# EAGLE board mc_board (EAGLE 7.5.0)
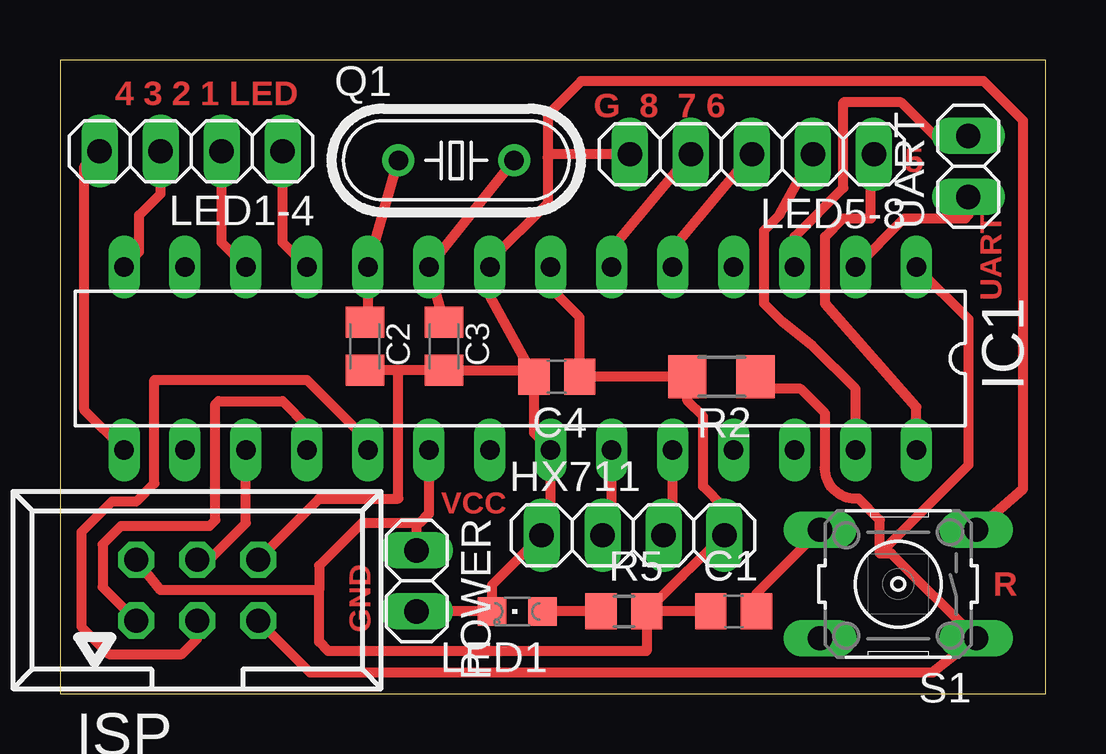
[diagram p0: board, top side]

Size 41.07 x 26.41 mm. Coordinates in mm from the lower left corner, seen from the top.
Outline: 0,0 41.07,0 41.07,26.41 0,26.41 0,0
Copper layers (1*16): Top 0.035mm / dielectric 1.5mm / Bottom 0.035mm
Design rules "default *": minimum track width 10mil, minimum drill 24mil, track to track 8mil, track to pad 8mil, pad to pad 8mil, via to via 8mil, smd to smd 8mil, copper to edge 25mil, drill to drill 8mil, minimum pad ring 10mil, minimum via ring 8mil, stop-mask expansion 4mil, vias tented up to drill 0mil, thermal gap 10mil

## Footprints (pad centres in the part's own frame; a part is rotated, then mirrored left to right if it is on the bottom)
C0805 = smd 1.3 x 1.5: 1 -0.95,0; 2 0.95,0
C0805K = smd 1.3 x 1.6: 1 -1,0; 2 1,0
1X04 = drill 1.016 long: 1 -3.81,0; 2 -1.27,0; 3 1.27,0; 4 3.81,0
DIL28-3 = drill 0.813 long: 1 -16.51,-3.81; 2 -13.97,-3.81; 3 -11.43,-3.81; 4 -8.89,-3.81; 5 -6.35,-3.81; 6 -3.81,-3.81; 7 -1.27,-3.81; 8 1.27,-3.81; 9 3.81,-3.81; 10 6.35,-3.81; 11 8.89,-3.81; 12 11.43,-3.81; 13 13.97,-3.81; 14 16.51,-3.81; 15 16.51,3.81; 16 13.97,3.81; 17 11.43,3.81; 18 8.89,3.81; 19 6.35,3.81; 20 3.81,3.81; 21 1.27,3.81; 22 -1.27,3.81; 23 -3.81,3.81; 24 -6.35,3.81; 25 -8.89,3.81; 26 -11.43,3.81; 27 -13.97,3.81; 28 -16.51,3.81
057-006-1 = drill 1 octagon: 1 -2.54,-1.27; 2 -2.54,1.27; 3 0,-1.27; 4 0,1.27; 5 2.54,-1.27; 6 2.54,1.27
CHIPLED_0805 = smd 1.2 x 1.2: A 0,-1.05; C 0,1.05
1X05 = drill 1.016 long: 1 -5.08,0; 2 -2.54,0; 3 0,0; 4 2.54,0; 5 5.08,0
1X02 = drill 1.016 long: 1 -1.27,0; 2 1.27,0
HC49/S = drill 0.813: 1 2.413,0; 2 -2.413,0
R1206 = smd 1.6 x 1.803: 1 -1.422,0; 2 1.422,0
R0805 = smd 1.3 x 1.5: 1 -0.95,0; 2 0.95,0
B3F-10XX = drill 1.016 long: 1 -3.251,2.261; 2 3.251,2.261; 3 -3.251,-2.261; 4 3.251,-2.261

## Placement (x,y rotation side)
C1  1uF  [C0805]  28.07,3.43 0 top
C2  18pF  [C0805K]  12.7,14.48 270 top
C3  18pF  [C0805K]  16,14.48 270 top
C4  100n  [C0805]  20.7,13.21 180 top
HX711  JP1  [1X04]  23.88,6.6 0 top
IC1  MEGA8-P  [DIL28-3]  19.18,13.97 180 top
ISP  ISP-Connector  [057-006-1]  5.71,4.32 0 top
LED1  green  [CHIPLED_0805]  19.05,3.43 90 top
LED1-4  JP3  [1X04]  5.46,22.61 180 top
LED5-8  JP2  [1X05]  28.83,22.48 180 top
POWER  JP2  [1X02]  14.86,4.7 270 top
Q1  16MHz  [HC49/S]  16.51,22.23 0 top
R2  10k  [R1206]  27.56,13.21 180 top
R5  680  [R0805]  23.5,3.43 0 top
S1  S1  [B3F-10XX]  34.92,4.57 180 top
UART  JP2  [1X02]  37.85,21.97 90 top

## Library data of the parts
C1 C4 R2 R5 = rcl-2
C2 C3 = resistor
HX711 LED1-4 LED5-8 POWER UART = pinhead
IC1 = atmel; OC_FARNELL: unknown; OC_NEWARK: unknown
ISP = con-panduit; OC_FARNELL: unknown; OC_NEWARK: unknown
LED1 = led
Q1 = crystal; OC_FARNELL: 1667008; OC_NEWARK: unknown
S1 = switch-omron; MPN: B3F-1000; OC_FARNELL: 176432; OC_NEWARK: 36M3542

## Nets
+5V: C1.1 C4.1 HX711.4 IC1.7 IC1.20 ISP.2 POWER.1 R2.2 R5.2
GND: C2.2 C3.2 C4.2 HX711.1 IC1.8 IC1.22 ISP.6 LED1.C LED5-8.5 POWER.2 S1.3
N$4: LED1.A R5.1
N$5: C3.1 IC1.9 Q1.1
N$6: C2.1 IC1.10 Q1.2
N$9: C1.2 S1.4
PB0/LED3: IC1.14 LED1-4.3
PB1/LED4: IC1.15 LED1-4.4
PB2: IC1.16
PB3/MOSI: IC1.17 ISP.4
PB4/MISO: IC1.18 ISP.1
PB5/SCK: IC1.19 ISP.3
PC0/DT: HX711.2 IC1.23
PC1/SCK: HX711.3 IC1.24
PC2: IC1.25
PC3: IC1.26
PC4/LED6: IC1.27 LED5-8.2
PC5/LED5: IC1.28 LED5-8.1
PD0/UART: IC1.2 UART.1
PD1/UART: IC1.3 UART.2
PD2: IC1.4
PD3/LED7: IC1.5 LED5-8.3
PD4/LED8: IC1.6 LED5-8.4
PD5/LED1: IC1.11 LED1-4.1
PD6/LED2: IC1.12 LED1-4.2
PD7: IC1.13
RESET: IC1.1 ISP.5 R2.1 S1.1
VDD: IC1.21

## Tracks (layer width: path | path; a pad name or v marks a point on that pad's centre or on a via)
+5V
  Top 0.406: IC1.20 15.37,7.49 14.99,7.11 14.86,7.11 | 14.86,7.11 12.57,7.11 10.79,5.33 10.79,4.32 | 10.79,4.32 4.19,4.32 ISP.2 | POWER.1 14.86,7.11 | IC1.7 20.45,16.89 21.65,15.69 C4.1 R2.2 26.14,12.22 26.8,11.56 26.8,8.64 27.69,7.75 HX711.4 25.91,4.89 R5.2 | C1.1 R5.2 | R5.2 24.45,1.78 11.18,1.78 10.79,2.16 10.79,4.32
GND
  Top 0.406: 14.1,13.48 C3.2 19.48,13.48 C4.2 | 14.1,13.48 C2.2 | C4.2 17.91,16.58 IC1.8 17.91,18.03 20.32,20.45 20.32,22.35 | C4.2 19.75,10.86 IC1.22 20.45,6.99 HX711.1 18,4.54 LED1.C POWER.2 | 14.1,13.48 14.1,8.13 10.79,8.13 ISP.6 | S1.3 40.13,8.53 40.13,23.88 38.48,25.53 21.72,25.53 20.32,24.13 20.32,22.35 | LED5-8.5 20.45,22.48 20.32,22.35
N$4
  Top 0.406: R5.1 LED1.A
N$5
  Top 0.406: Q1.1 IC1.9 C3.1
N$6
  Top 0.406: Q1.2 IC1.10 12.83,15.24 C2.1
N$9
  Top 0.406: C1.2 29.02,4.18 S1.4
PB0/LED3
  Top 0.406: IC1.14 3.3,18.41 3.3,19.94 4.19,20.83 LED1-4.3
PB1/LED4
  Top 0.406: IC1.15 1.02,11.81 1.02,21.97 LED1-4.4
PB3/MOSI
  Top 0.406: ISP.4 6.22,5.59 7.75,7.11 IC1.17
PB4/MISO
  Top 0.406: IC1.18 10.29,11.18 9.27,12.19 6.6,12.19 6.48,12.06 6.48,7.24 6.22,6.99 2.54,6.99 1.78,6.22 1.78,4.45 ISP.1
PB5/SCK
  Top 0.406: IC1.19 12.83,10.54 10.29,13.08 3.94,13.08 3.94,8.76 3.17,8 2.16,8 0.89,6.73 0.89,2.79 2.03,1.65 5.08,1.65 5.71,2.29 ISP.3
PC0/DT
  Top 0.406: HX711.2 22.99,6.99 IC1.23
PC1/SCK
  Top 0.406: HX711.3 25.53,6.99 IC1.24
PC4/LED6
  Top 0.406: IC1.27 33.15,12.7 31.37,14.48 30.1,15.49 29.34,16.26 29.34,19.3 29.97,19.94 LED5-8.2
PC5/LED5
  Top 0.406: IC1.28 35.69,11.94 31.88,16.26 31.88,19.05 32.64,19.81 33.78,19.81 33.78,22.35 LED5-8.1
PD0/UART
  Top 0.406: IC1.2 35.18,19.81 37.72,19.81 37.85,19.94 UART.1
PD1/UART
  Top 0.406: IC1.3 30.61,19.05 32.64,21.08 32.64,24.64 35.05,24.64 36.45,23.24 UART.2
PD3/LED7
  Top 0.406: IC1.5 25.53,18.54 LED5-8.3
PD4/LED8
  Top 0.406: IC1.6 22.99,18.54 LED5-8.4
PD5/LED1
  Top 0.406: IC1.11 9.27,18.8 LED1-4.1
PD6/LED2
  Top 0.406: IC1.12 6.73,18.8 LED1-4.2
RESET
  Top 0.406: ISP.5 10.41,0.89 36.37,0.89 S1.1 34.65,5.84 34.16,5.84 | R2.1 29.49,12.7 30.86,12.7 31.88,11.68 31.88,9.53 arc95 33.15,8.13 33.27,8.13 34.16,7.24 34.16,5.84 | IC1.1 37.85,15.62 37.85,9.53 34.16,5.84

## Text on the board
Top: 4 3 2 1 LED | G 8 7 6 | 5 | UART | VCC | R | GND